# Altium PCB ArcadeJoystick.PcbDoc
Units mil, origin at the board's own origin, x right, y up, seen from the top; angles counter-clockwise.
Board outline 3930 x 2360.62 mil, 2 copper layers (Top Layer, Bottom Layer), stack 50.044 mil thick; 53 components, 82 nets, 266 pads, 42 vias.
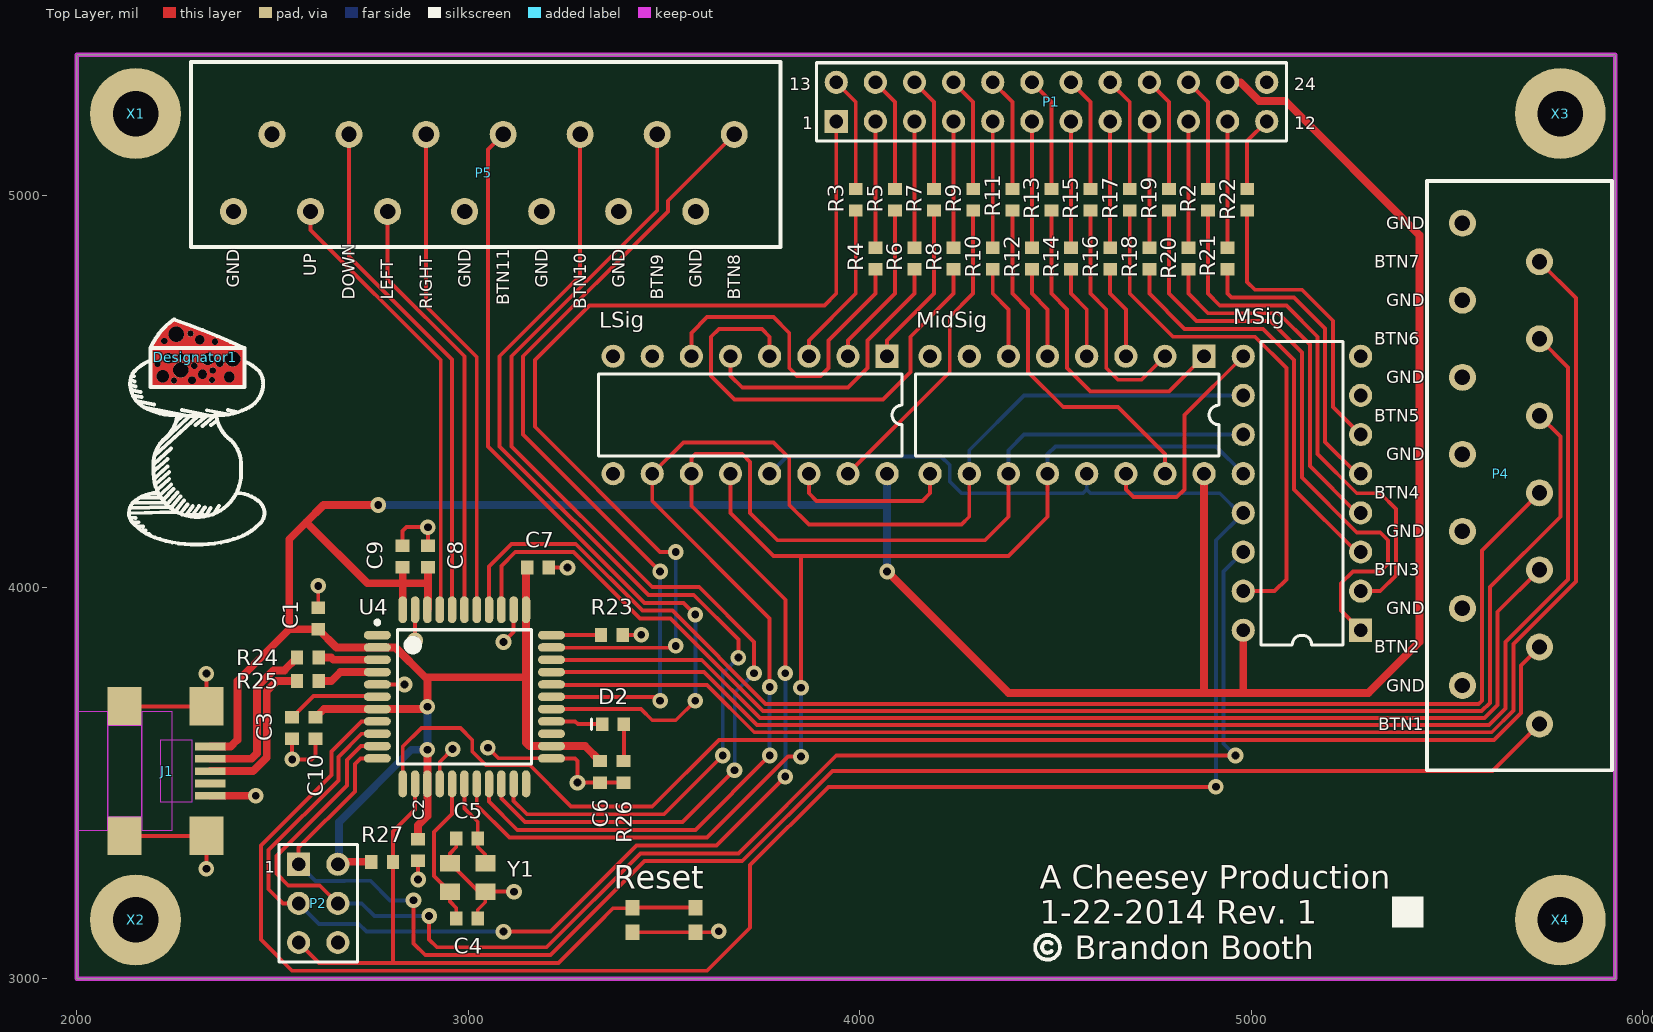
[diagram p0: Top Layer view]
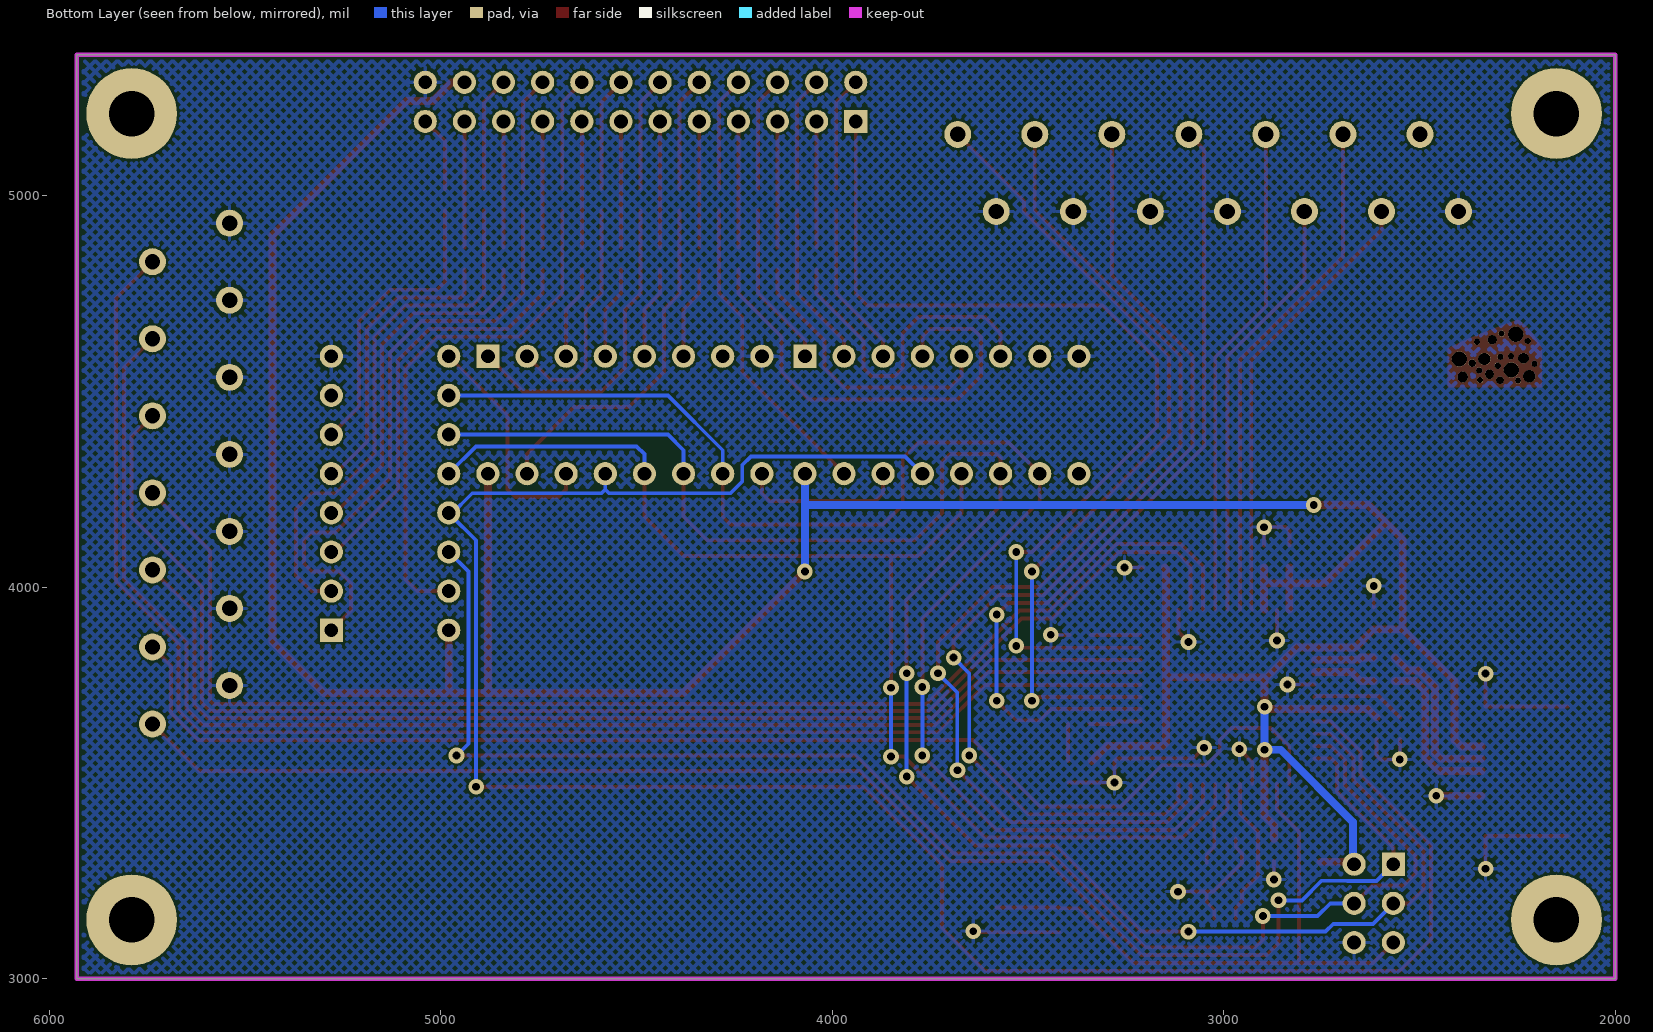
[diagram p1: Bottom Layer view, seen from below]

## Layer stack, top to bottom
Top Layer: signal copper 1.4
Dielectric: core 47.2441, FR-4, Dk 4.8
Bottom Layer: signal copper 1.4

## Board outline
2000,3000.06 5930,2999.38 5930,5360 2000,5360

## Design rules (kind name [scope] priority, off if disabled: settings)
Clearance "Clearance~Sunstone Circuits" [All] p1: gap=5.8 // Sunstone Circuits Minimum Clearance Rule (Double Sided)
DiffPairsRouting [All] p1: maxlimit=10 minlimit=5 mostfreqgap=5 maxuncoupledlength=500
HoleSize "HoleSize~Sunstone Circuits" [All] p1: absolutevalues=TRUE maxlimit=251 minlimit=16 maxpercent=80.000 minpercent=20.000 // SSC Hole Size Rule For Single Sided & Double Sided Designs.
HoleSize Testpoint [All] p2: absolutevalues=TRUE maxlimit=100 minlimit=1 maxpercent=80.000 minpercent=20.000
HoleSize TestPointUsage [All] p3: absolutevalues=TRUE maxlimit=100 minlimit=1 maxpercent=80.000 minpercent=20.000
MinimumAnnularRing "MinimumAnnularRing~Sunstone Circuits" [All] p1: minimumring=7 // Sunstone Circuits Minimum Annular Ring (Double Sided)
PlaneClearance "PlaneClearance~Sunstone Circuits" [All] p1: clearance=12 // Sunstone Circuits Power Plane Clearance Rule (Double Sided)
PlaneConnect "PlaneConnect~Sunstone Circuits" [All] p1: planeconnectstyle=Relief reliefexpansion=10 reliefentries=4 reliefconductorwidth=8 reliefairgap=10 // Sunstone Circuits Power Plane Connect Rule (Double Sided)
PolygonConnect "PolygonConnect~Sunstone Circuits" [All] p1: connectstyle=Relief reliefconductorwidth=8 reliefentries=4 polygonreliefangle="90 Angle" airgapwidth=10 // Sunstone Circuits Polygon Connect Style (Double Sided)
RoutingVias "RoutingVias~Sunstone Circuits" [All] p1: holewidth=16 width=30 viastyle="Through Hole" minholewidth=16 minwidth=30 maxholewidth=20 maxwidth=40 // Sunstone Circuits Routing Vias Rule (Double Sided)
ShortCircuit "ShortCircuit~Sunstone Circuits" [All] p1: allowed=FALSE // Sunstone Circuits Short Circuit Rule~Do Not Allow (Double Sided)
SilkToSolderMaskClearance SilkscreenOverComponentPads [IsPad] p1: minsilkscreentomaskgap=10 clearancetoexposedcopper=TRUE
SolderMaskExpansion "SolderMaskExpansion~Sunstone Circuits" [All] p1: expansion=3 // Sunstone Circuits Solder Mask Expansion Rule (Double Sided)
Width "Width~Sunstone Circuits" [All] p1: maxlimit=100 minlimit=8 preferedwidth=10 // Sunstone Circuits Minimum Width Rule (Double Sided)
22 further rules are at their usual default settings.

## Classes and differential pairs
component class ArcadeJoystick: LSig MidSig MSig P1 R2 R3 R4 R5 R6 R7 R8 R9 R10 R11 R12 R13 R14 R15 R16 R17 R18 R19 R20 R21 R22
component class Teensy: C1 C2 C3 C4 C5 C6 C7 C8 C9 C10 D2 J1 P2 P4 P5 R23 R24 R25 R26 R27 Reset S1 U4 X1 X2 X3 X4 Y1
differential pair USB: +USB_P -USB_N
differential pair USB_D: +USB_D_P -USB_D_N

## Components (designator, comment, footprint, x,y, rotation, side; value= is the part's Value field where it differs from the comment)
C1 "Cap Semi" 1608[0603] 2616.69,3920 r270 top
C2 "Cap Semi" 1608[0603] 2871.69,3328.35 r270 top
C3 "Cap Semi" 1608[0603] 2550,3640 r270 top
C4 "Cap Semi" 1608[0603] 2996.69,3153.35 r180 top
C5 "Cap Semi" 1608[0603] 2996.69,3358.35 r0 top
C6 "Cap Semi" 1608[0603] 3336.69,3528.35 r270 top
C7 "Cap Semi" 1608[0603] 3178.35,4050 r0 top
C8 "Cap Semi" 1608[0603] 2896.69,4078.35 r90 top
C9 "Cap Semi" 1608[0603] 2831.69,4078.35 r90 top
C10 "Cap Semi" 1608[0603] 2610,3640 r90 top
D2 "LED2" INDC1608L 3370,3650 r0 top
Designator1 "Comment" CHEESE 2305,4565 r0 top
J1 "UX60A-MB-5ST" UX60A-MB-5ST 2000,3530 r270 top
LSig "MC74HC595AN" 648-08 3720,4440 r180 top (schematic designator U1)
MidSig "MC74HC595AN" 648-08 4530,4440 r180 top (schematic designator U2)
MSig "MC74HC595AN" 648-08 5130,4240 r90 top (schematic designator U3)
P1 "Header 12X2A" HDR2X12_CEN 3940,5190 r0 top
P2 "Header 3X2" HDR2X3 2566.65,3292.24 r270 top
P4 "Header 14" "PTSA 0,5/14-2,5-Z" 5540,4930 r90 top
P5 "Header 14" "PTSA 0,5/14-2,5-Z" 2400,4960 r180 top
R2 "Res Semi" 1608[0603] 4890,4990 r270 top
R3 "Res Semi" 1608[0603] 3990,4990 r270 top
R4 "Res Semi" 1608[0603] 4040,4840 r90 top
R5 "Res Semi" 1608[0603] 4090,4990 r270 top
R6 "Res Semi" 1608[0603] 4140,4840 r90 top
R7 "Res Semi" 1608[0603] 4190,4990 r270 top
R8 "Res Semi" 1608[0603] 4240,4840 r90 top
R9 "Res Semi" 1608[0603] 4290,4990 r270 top
R10 "Res Semi" 1608[0603] 4340,4840 r90 top
R11 "Res Semi" 1608[0603] 4390,4990 r270 top
R12 "Res Semi" 1608[0603] 4440,4840 r90 top
R13 "Res Semi" 1608[0603] 4490,4990 r270 top
R14 "Res Semi" 1608[0603] 4540,4840 r90 top
R15 "Res Semi" 1608[0603] 4590,4990 r270 top
R16 "Res Semi" 1608[0603] 4640,4840 r90 top
R17 "Res Semi" 1608[0603] 4690,4990 r270 top
R18 "Res Semi" 1608[0603] 4740,4840 r90 top
R19 "Res Semi" 1608[0603] 4790,4990 r270 top
R20 "Res Semi" 1608[0603] 4840,4840 r90 top
R21 "Res Semi" 1608[0603] 4940,4840 r90 top
R22 "Res Semi" 1608[0603] 4990,4990 r90 top
R23 "Res Semi" 1608[0603] 3366.69,3878.35 r0 top
R24 "Res Semi" 1608[0603] 2590,3820 r0 top
R25 "Res Semi" 1608[0603] 2590,3760 r0 top
R26 "Res Semi" 1608[0603] 3396.69,3528.35 r90 top
R27 "Res Semi" 1608[0603] 2780,3298.35 r0 top
Reset "KMR231NGLFS" KMR231NGLFS 3500,3201.18 r180 top (schematic designator S1)
U4 "ATmega32U4-AU" 44ML_N 2990,3720 r0 top
X1 "4-40 Hole" "4-40 HOLE" 2150,5210 r0 top
X2 "4-40 Hole" "4-40 HOLE" 2150,3150 r0 top
X3 "4-40 Hole" "4-40 HOLE" 5790,5210 r0 top
X4 "4-40 Hole" "4-40 HOLE" 5790,3150 r0 top
Y1 "ABM8-16.000MHZ-10-1-U-T" ABM8-16.000MHZ-10-1-U-T 2998.11,3258.5 r0 top

## Footprints (in the part's own frame and the unit in brackets; to place one, negate y for a bottom-side part, rotate by r counter-clockwise, add the part's x,y. Pads: shape width x height; smd on the part's side, far side on the other; paste and mask are expansions set on the pad)
"4-40 HOLE" [mil]
  round 232 hole 116 unplated: 1(0,0)
44ML_N [mm] "Thin QFP, 44-Leads, Body 10x10mm, Pitch 0.8mm, IPC Medium Density"
  oval 1.75x0.55 smd: 1(-5.65,4) 2(-5.65,3.2) 3(-5.65,2.4) 4(-5.65,1.6) 5(-5.65,0.8) 6(-5.65,0) 7(-5.65,-0.8) 8(-5.65,-1.6) 9(-5.65,-2.4) 10(-5.65,-3.2) 11(-5.65,-4) 23(5.65,-4) 24(5.65,-3.2) 25(5.65,-2.4) 26(5.65,-1.6) 27(5.65,-0.8) 28(5.65,0) 29(5.65,0.8) 30(5.65,1.6) 31(5.65,2.4) 32(5.65,3.2) 33(5.65,4)
  oval 0.55x1.75 smd: 12(-4,-5.65) 13(-3.2,-5.65) 14(-2.4,-5.65) 15(-1.6,-5.65) 16(-0.8,-5.65) 17(0,-5.65) 18(0.8,-5.65) 19(1.6,-5.65) 20(2.4,-5.65) 21(3.2,-5.65) 22(4,-5.65) 34(4,5.65) 35(3.2,5.65) 36(2.4,5.65) 37(1.6,5.65) 38(0.8,5.65) 39(0,5.65) 40(-0.8,5.65) 41(-1.6,5.65) 42(-2.4,5.65) 43(-3.2,5.65) 44(-4,5.65)
  silkscreen extent -5.77,-4.35 4.35,4.95, body extent -5,-5 5,5, height 1.2
648-08 [mm] "DIP; 16 Leads; Row Spacing 7.62 mm; Pitch 2.54 mm"
  rect 1.5x1.5 hole 0.9: 1(-8.89,-3.81)
  round 1.5 hole 0.9: 2(-6.35,-3.81) 3(-3.81,-3.81) 4(-1.27,-3.81) 5(1.27,-3.81) 6(3.81,-3.81) 7(6.35,-3.81) 8(8.89,-3.81) 9(8.89,3.81) 10(6.35,3.81) 11(3.81,3.81) 12(1.27,3.81) 13(-1.27,3.81) 14(-3.81,3.81) 15(-6.35,3.81) 16(-8.89,3.81)
  silkscreen extent -9.85,-2.65 9.85,2.65
1608[0603] [mm] "Chip Capacitor, Body 1.6x0.8mm, IPC High Density"
  rect 0.8x0.9 smd: 1(-0.7,0) 2(0.7,0)
  body extent -0.87,-0.48 0.87,0.48, height 1.3
ABM8-16.000MHZ-10-1-U-T [mm]
  rect 1.3x1.05 smd: 0(-1.15,0.925) 0(1.15,-0.925) 2(-1.15,-0.925) 4(1.15,0.925)
CHEESE [mm]
  round 0.4 hole 0.4: 0(-2.515,0.152) 0(-2.083,1.626) 0(-1.448,-0.94) 0(-0.991,0.635) 0(-0.381,2.108) 0(-0.305,0.61) 0(-0.127,0.025) 0(1.016,-0.914) 0(1.067,-0.279) 0(1.219,1.575)
  round 0.8 hole 0.8: 0(-2.184,-0.66) 0(0.737,0.457)
  round 0.7 hole 0.7: 0(-1.803,0.508) 0(2.134,-0.711)
  round 1 hole 1: 0(-1.295,2.057) 0(-1.016,-0.254) 0(2.362,0.457)
  round 0.5 hole 0.5: 0(-0.279,-0.914) 0(1.524,0.178)
  round 0.6 hole 0.6: 0(0.229,1.702) 0(0.406,-0.533)
  Top Layer region: -2.972,-1.372 -2.972,1.168 3.124,1.168 3.124,-1.372
  Top Layer region: -2.972,1.168 -2.335,2.207 -1.44,3.033 -1.44,3.033 -1.425,3.012 0.873,2.148 3.124,1.168 3.124,1.168 3.124,1.168
  silkscreen extent -2.97,-1.37 3.12,3.03
HDR2X3 [mm] "Connector; Header; 3x2 Position"
  rect 1.5x1.5 hole 0.9: 1(0,0)
  round 1.5 hole 0.9: 2(0,2.54) 3(2.54,0) 4(2.54,2.54) 5(5.08,0) 6(5.08,2.54)
  silkscreen extent -1.27,-1.27 6.35,3.81
HDR2X12_CEN [mm] "Connector; Header; 12x2 Position"
  rect 1.5x1.5 hole 0.9: 1(0,0)
  round 1.5 hole 0.9: 2(2.54,0) 3(5.08,0) 4(7.62,0) 5(10.16,0) 6(12.7,0) 7(15.24,0) 8(17.78,0) 9(20.32,0) 10(22.86,0) 11(25.4,0) 12(27.94,0) 13(0,2.54) 14(2.54,2.54) 15(5.08,2.54) 16(7.62,2.54) 17(10.16,2.54) 18(12.7,2.54) 19(15.24,2.54) 20(17.78,2.54) 21(20.32,2.54) 22(22.86,2.54) 23(25.4,2.54) 24(27.94,2.54)
  silkscreen extent -1.27,-1.27 29.21,3.81
INDC1608L [mm] "Chip Inductor, Body 1.6x0.8mm, IPC High Density"
  rect 0.8x0.9 smd: 1(-0.7,0) 2(0.7,0)
  silkscreen extent -1.4,-0.35 -1.4,0.35, body extent -0.87,-0.48 0.87,0.48, height 0.55
KMR231NGLFS [mm] "Top Button Switch SMT"
  rect 0.9x1 smd: 1(-2.05,2.1) 1(2.05,2.1) 2(-2.05,0.5) 2(2.05,0.5)
  body extent -2,-0.1 2,2.7, height 1.9
"PTSA 0,5/14-2,5-Z" [mm] "PCB termination blocks, offset pins, 2.5 mm   pitch,      color: green"
  round 1.75 hole 1: 1(0,0) 2(-2.5,-5) 3(-5,0) 4(-7.5,-5) 5(-10,0) 6(-12.5,-5) 7(-15,0) 8(-17.5,-5) 9(-20,0) 10(-22.5,-5) 11(-25,0) 12(-27.5,-5) 13(-30,0) 14(-32.5,-5)
  silkscreen extent -35.5,-9.7 2.75,2.3
UX60A-MB-5ST [mm] "USBMiniBSocket"
  rect 2.5x2.2 smd: 0(-4.2,8.4) 0(-4.2,3.1) 0(4.2,8.4) 0(4.2,3.1)
  rect 0.5x2 smd: 1(-1.6,8.65) 2(-0.8,8.65) 3(0,8.65) 4(0.8,8.65) 5(1.6,8.65)
  Top Layer keep-out region: -2,5.4 2,5.4 2,7.5 -2,7.5
  Top Layer keep-out region: -3.85,4.2 3.85,4.2 3.85,6.2 -3.85,6.2
  Top Layer keep-out region: -2.95,2 2.95,2 2.95,4.2 -2.95,4.2
  Top Layer keep-out region: -3.85,0 3.85,0 3.85,2 -3.85,2

## Part data
C1 C2 C3 C4 C5 C6 C7 C8 C9 C10: "Capacitor (Semiconductor SIM Model)"
D2: "475-2816-1-ND"
J1: "USBMiniBSocket Metal Shield SMT Type Without Positioning Post"
LSig MidSig MSig: "8-Bit Serial-Input/Serial or Prallel-Output Shift Register with Latched 3-State Outputs"
P1: "Header, 12-Pin, Dual row"
P2: "Header, 3-Pin, Dual row"
P4 P5: "Header, 14-Pin"
R2 R3 R4 R5 R6 R7 R8 R9 R10 R11 R12 R13 R14 R15 R16 R17 R18 R19 R20 R21 R22 R23 R24 R25 R26 R27: "Semiconductor Resistor"
Reset: "KMR 2 Series  Microminiature SMT Top Actuated"
U4: "8-bit AVR Microcontroller, 2.7-5.5V, 32KB Flash, 2.5KB EEPROM, 1KB SRAM, USB Controller, 44-pin TQFP, Industrial Grade (-40°C to 85°C)"
Y1: "Crystal Resonator"

## Via types
v1: diameter 40, hole 20, Top Layer to Bottom Layer, 42 vias

## Nets (pads, with @x,y where several pads share a name; then routed paths per layer and width w, separated by ;. In a path a pad name is that pad's centre, name@x,y a point inside that pad or via, vN(x,y) a via of type N, cw(c..) or ccw(c..) an arc to the next point about the centre after c; other vN are vias at no path point)
A: MidSig.15 R11.2 | length 916
  Top Layer w10: R11.2 4390,4750 4430,4710 4430,4550 4520,4460 4660,4460 4780,4340 MidSig.15
B: MidSig.1 R13.2 | length 831.1
  Top Layer w10: R13.2 4490,4750 4530,4710 4530,4560 4590,4500 4790,4500 MidSig.1
BUTTON1/MISO: P2.1 P4.14 U4.11 | length 3954.6
  Top Layer w10: P2.1 2566.65,3335 2710,3478.35 2710,3548.35 2724.17,3562.52 U4.11 ; v1(2860,3200) 2860,3090 2890,3060 3210,3060 3450,3300 3700,3300 3930,3530 5616.38,3530 P4.14
  Bottom Layer w10: P2.1 2609.18,3249.72 2684.27,3249.72 2684.55,3250 2750,3250 2800,3200 v1(2860,3200)
BUTTON2: P4.12 U4.12 | length 3359.2
  Top Layer w10: U4.12 2832.52,3592.52 2880,3640 2980,3640 3010,3610 3010,3580 3044.99,3545.01 3157.49,3545.01 3262.5,3440 3470,3440 3640,3610 5620.91,3610 5690,3679.09 5690,3800.47 P4.12
BUTTON3: P4.10 U4.31 | length 2882.6
  Top Layer w10: U4.31 3596.42,3814.49 3745.46,3665.45 5596.36,3665.45 5630,3699.09 5630,3937.32 P4.10
BUTTON4: P4.8 U4.37 | length 3435.8
  Top Layer w10: U4.37 3052.99,4052.99 3110,4110 3274.54,4110 3444.54,3940 3521.82,3940 3759.82,3702 5242,3702 5242.55,3701.45 5581.45,3701.45 5590,3710 5590,4094.17 P4.8
BUTTON5: P4.6 U4.36 | length 3659.3
  Top Layer w10: U4.36 3084.49,4054.49 3120,4090 3269.09,4090 3439.09,3920 3516.37,3920 3752.92,3683.45 5588.9,3683.45 5610,3704.54 5610,4000 5790,4180 5790,4384.72 P4.6
BUTTON6: P4.4 U4.30 | length 3552.6
  Top Layer w10: U4.30 3602.46,3782.99 3738.01,3647.45 5607.45,3647.45 5650,3690 5650,3860 5810,4020 5810,4561.57 P4.4
BUTTON7: P4.2 U4.29 | length 3782.8
  Top Layer w10: U4.29 3213.95,3749.99 3610.01,3749.99 3730.55,3629.45 5614.9,3629.45 5670,3684.54 5670,3854.54 5830,4014.54 5830,4738.43 P4.2
BUTTON8: P5.14 U4.28 | length 2097
  Top Layer w10: U4.28 3480,3720 v1(3490,3710) ; v1(3490,4040) 3140,4390 3140,4590 3510,4960 3510,4987.32 P5.14
  Bottom Layer w10: v1(3490,3710) v1(3490,4040)
BUTTON9: P5.12 U4.20 | length 2839.3
  Top Layer w10: U4.20 3084.49,3460.05 3144.54,3400 3547.51,3400 v1(3680,3532.49) ; P5.12 3482.68,4962.68 3110,4590 3110,4360 3470,4000 3590,4000 3730,3860 v1(3730,3780)
  Bottom Layer w10: v1(3680,3532.49) 3680.8,3533.29 3680.8,3730.8 v1(3730,3780)
BUTTON10: P5.10 U4.21 | length 2663.1
  Top Layer w10: U4.21 3115.98,3454.02 3150,3420 3500,3420 v1(3650,3570) ; P5.10 3285.83,4795.83 3080,4590 3080,4360 3460,3980 3575.98,3980 3690,3865.98 v1(3690,3820)
  Bottom Layer w10: v1(3650,3570) 3650,3780 v1(3690,3820)
BUTTON11: P5.8 U4.27 | length 2141.2
  Top Layer w10: P5.8 3050,5117.87 3050,4360 3450,3960 3550,3960 v1(3580,3930) ; U4.27 3441.5,3688.5 3470,3660 3530,3660 v1(3580,3710)
  Bottom Layer w10: v1(3580,3710) v1(3580,3930)
BUTTONDOWN: P5.4 U4.40 | length 1323.4
  Top Layer w10: P5.4 2695.28,4844.73 2958.5,4581.5 U4.40
BUTTONLEFT: P5.5 U4.39 | length 1098.9
  Top Layer w10: P5.5 2793.7,4786.3 2990,4590 U4.39
BUTTONRIGHT: P5.6 U4.38 | length 1268
  Top Layer w10: P5.6 2892.13,4717.87 3021.5,4588.5 U4.38
BUTTONUP: P5.3 U4.41 | length 1156.5
  Top Layer w10: P5.3 2596.85,4913.15 2929.69,4580.31 2929.69,3945.13 U4.41
C: MidSig.2 R15.2 | length 606.3
  Top Layer w10: R15.2 4590,4750 4630,4710 4630,4560 4660,4530 4720,4530 MidSig.2
D: MidSig.3 R16.1 | length 239
  Top Layer w10: R16.1 4640,4750 4680,4710 MidSig.3
E: MidSig.4 R14.1 | length 239
  Top Layer w10: R14.1 4540,4750 4580,4710 MidSig.4
F: MidSig.5 R12.1 | length 239
  Top Layer w10: R12.1 4440,4750 4480,4710 MidSig.5
G: MidSig.6 R10.1 | length 239
  Top Layer w10: R10.1 4340,4750 4380,4710 MidSig.6
GND: C1.1 C2.2 C3.2 C4.1 C5.1 C6.2 C7.2 C8.2 C9.2 C10.1 J1.0 J1.5 LSig.8 MidSig.8 MSig.8 P1.24 P2.6 P4.1 P4.3 P4.5 P4.7 P4.9 P4.11 P4.13 P5.1 P5.7 P5.9 P5.11 P5.13 R23.2 R26.1 Reset.1 U4.5 U4.15 U4.23 U4.35 U4.43 Y1.0 | length 2553.2
  Top Layer w10: J1.0@2122.05,3364.65 2330.71,3364.65 v1(2330.71,3280.71) ; J1.0@2122.05,3695.35 2330.71,3695.35 v1(2330.71,3779.29) ; C3.2 v1(2550,3560) 2600,3560 2610,3570 C10.1 ; C1.1@2614.25,3950 C1.1 v1(2616.69,4003.31) ; U4.5 v1(2836.85,3751.5) ; C9.2 2831.69,4143.35 2841.69,4153.35 v1(2896.69,4153.35) C8.2 ; v1(2864.02,3864.02) U4.43 ; v1(2871.69,3253.35) C2.2 ; U4.15 2927.01,3553.34 v1(2960,3586.33) ; C5.1 2969.13,3335.79 2952.83,3319.49 2952.83,3294.92 3025.67,3222.09 Y1.0@3043.39,3222.09 ; C4.1 3024.25,3175.91 3043.39,3195.04 Y1.0@3043.39,3222.09 ; v1(3050,3590) 3076.99,3563.01 3211.95,3563.01 U4.23 3272.52,3562.52 3279.13,3555.91 v1(3279.13,3500.79) C6.2 R26.1 ; v1(3090,3860) 3115.98,3885.98 U4.35 ; v1(3116.69,3222.09) Y1.0@3043.39,3222.09 ; C7.2 v1(3253.35,4050) v1@3253.35,4065 ; R23.2 v1(3441.69,3878.35) ; Reset.1@3419.29,3118.5 3580.71,3118.5 3637.32,3118.5 v1(3640,3121.18)
  Top Layer w20: J1.5 v1(2457.01,3467.01)
LATCH_CLOCK: LSig.12 MidSig.12 MSig.12 U4.18 | length 3220.1
  Top Layer w10: U4.18 3021.5,3443.54 3105.04,3360 3610,3360 3817.04,3567.04 v1(3850,3567.04) ; LSig.12 3670,4190 3780,4080 3850,4080 ; v1(3850,3743.14) 3850,4080 ; MidSig.12 4480,4180 4380,4080 3850,4080
  Bottom Layer w10: v1(3850,3567.04) v1(3850,3743.14) ; MidSig.12 4480,4340 4500,4360 4910,4360 MSig.12 ; MSig.12@4969.2,4280.8 MSig.12@4969.2,4290.8
LED: P1.1 U4.32 | length 2501.8
  Top Layer w10: U4.32@3213.08,3845.35 3525.35,3845.35 v1(3530,3850) ; v1(3530,4090) 3490,4090 3170,4410 3170,4580 3310,4720 3910,4720 3940,4750 P1.1
  Bottom Layer w10: v1(3530,3850) v1(3530,4090)
LS_A: LSig.15 R9.2 | length 805
  Top Layer w10: LSig.15 4230,4550 4230,4690 4290,4750 R9.2
LS_B: LSig.1 R7.2 | length 422.1
  Top Layer w10: LSig.1 4070,4630 4190,4750 R7.2
LS_C: LSig.2 R5.2 | length 422.1
  Top Layer w10: LSig.2 3970,4630 4090,4750 R5.2
LS_D: LSig.3 R3.2 | length 422.1
  Top Layer w10: LSig.3 3870,4630 3990,4750 R3.2
LS_E: LSig.4 R8.1 | length 1188.4
  Top Layer w10: LSig.4 3770,4640 3750,4660 3640,4660 3620,4640 3620,4540 3680,4480 4060,4480 4130,4550 4130,4640 4240,4750 R8.1
LS_F: LSig.5 R6.1 | length 735.3
  Top Layer w10: LSig.5 3670,4540 3700,4510 3970,4510 4020,4560 4020,4630 4140,4750 R6.1
LS_G: LSig.6 R4.1 | length 851.9
  Top Layer w10: LSig.6 3570,4650 3610,4690 3780,4690 3820,4650 3820,4560 3840,4540 3900,4540 3920,4560 3920,4630 4040,4750 R4.1
LS_SERIALOUT: LSig.9
MOSI: MSig.14 P2.4 U4.10 | length 3776.2
  Top Layer w10: P2.4 2620.55,3238.35 2540,3238.35 2510,3268.35 2510,3313.03 2690,3493.03 2690,3558.35 2725.67,3594.02 U4.10 ; v1(2900,3160) 2900,3100 2920,3080 3200,3080 3440,3320 3690,3320 3940,3570 v1(4960,3570)
  Bottom Layer w10: P2.4 2727.76,3192.24 2760,3160 v1(2900,3160) ; v1(4960,3570) 4930,3600 4930,4040 MSig.14
MS_A: MSig.15 R17.2 | length 1353.6
  Top Layer w10: R17.2 4690,4750 4800,4640 5010,4640 5090,4560 5090,4020 5060,3990 MSig.15
MS_B: MSig.1 R19.2 | length 1562.3
  Top Layer w10: R19.2 4790,4750 4860,4680 5050,4680 5130,4600 5130,4280 5270,4140 5330,4140 5350,4120 5350,4060 5330,4040 5260,4040 5230,4010 5230,3940 MSig.1
MS_C: MSig.2 R2.2 | length 1372.6
  Top Layer w10: R2.2 4890,4750 4920,4720 5090,4720 5170,4640 5170,4340 5270,4240 5330,4240 5370,4200 5370,4030 5330,3990 MSig.2
MS_D: MSig.3 R18.1 | length 1059.1
  Top Layer w10: R18.1 4740,4750 4830,4660 5030,4660 5110,4580 5110,4250 MSig.3@5270,4090
MS_E: MSig.4 R20.1 | length 906
  Top Layer w10: R20.1 4840,4750 4890,4700 5070,4700 5150,4620 5150,4310 MSig.4@5270,4190
MS_F: MSig.5 R21.1 | length 752.9
  Top Layer w10: R21.1 4940,4750 4950,4740 5110,4740 5189.2,4660.8 5189.2,4370.8 MSig.5@5270,4290
MS_G: MSig.6 R22.1 | length 762.9
  Top Layer w10: R22.1 4990,4780 5010,4760 5130,4760 5209.2,4680.8 5209.2,4460.8 MSig.6
MS_SERIALOUT: MidSig.14 MSig.9 | length 608.7
  Top Layer w10: MidSig.14 4680,4250 4700,4230 4810,4230 4830,4250 4830,4440 MSig.9
NetD2_2: D2.2 R26.2 | length 94.5
  Top Layer w10: R26.2 3397.56,3556.77 D2.2
NetP1_2: P1.2 R4.2 | length 322.4
  Top Layer w10: R4.2 P1.2
NetP1_3: P1.3 R6.2 | length 322.4
  Top Layer w10: R6.2 P1.3
NetP1_4: P1.4 R8.2 | length 322.4
  Top Layer w10: R8.2 P1.4
NetP1_5: P1.5 R10.2 | length 322.4
  Top Layer w10: R10.2 P1.5
NetP1_6: P1.6 R12.2 | length 322.4
  Top Layer w10: R12.2 P1.6
NetP1_7: P1.7 R14.2 | length 322.4
  Top Layer w10: R14.2 P1.7
NetP1_8: P1.8 R16.2 | length 322.4
  Top Layer w10: R16.2 P1.8
NetP1_9: P1.9 R18.2 | length 322.4
  Top Layer w10: R18.2 P1.9
NetP1_10: P1.10 R20.2 | length 322.4
  Top Layer w10: R20.2 P1.10
NetP1_11: P1.11 R21.2 | length 322.4
  Top Layer w10: R21.2 P1.11
NetP1_12: P1.12 R22.2 | length 193.2
  Top Layer w10: R22.2 4990,5140 P1.12
NetP1_13: P1.13 R3.1 | length 293.2
  Top Layer w10: P1.13 3990,5240 R3.1
NetP1_14: P1.14 R5.1 | length 293.2
  Top Layer w10: P1.14 4090,5240 R5.1
NetP1_15: P1.15 R7.1 | length 293.2
  Top Layer w10: P1.15 4190,5240 R7.1
NetP1_16: P1.16 R9.1 | length 293.2
  Top Layer w10: P1.16 4290,5240 R9.1
NetP1_17: P1.17 R11.1 | length 293.2
  Top Layer w10: P1.17 4390,5240 R11.1
NetP1_18: P1.18 R13.1 | length 293.2
  Top Layer w10: P1.18 4490,5240 R13.1
NetP1_19: P1.19 R15.1 | length 293.1
  Top Layer w10: P1.19 4590,5240 R15.1
NetP1_20: P1.20 R17.1 | length 293.2
  Top Layer w10: P1.20 4690,5240 R17.1
NetP1_21: P1.21 R19.1 | length 293.2
  Top Layer w10: P1.21 4790,5240 R19.1
NetP1_22: P1.22 R2.1 | length 293.1
  Top Layer w10: P1.22 4890,5240 R2.1
OUTPUT_ENABLE: LSig.13 MidSig.13 MSig.13 U4.8 | length 5545.2
  Top Layer w10: U4.8 2727.01,3657.01 2650,3580 2650,3520 2470,3340 2470,3100 2550,3020 3610,3020 3720,3130 3720,3290 3920,3490 v1(4910,3490)
  Bottom Layer w10: LSig.13 3814.03,4334.03 4207.83,4334.03 4230,4311.85 4230,4270 4260,4240 4570,4240 4580,4250 ; MidSig.13 4580,4250 ; v1(4910,3490) 4910,4120 4975,4185 4920,4240 4590,4240 4580,4250
PD4: U4.25
PD5: U4.22
PE2/HWB: R23.1 U4.33 | length 125.8
  Top Layer w10: U4.33@3213.31,3878.35 R23.1
PE6: U4.1
PWR_LED: D2.1 U4.26 | length 134.8
  Top Layer w10: U4.26@3213.78,3658.35 U4.26 3272.99,3657.01 3280,3650 D2.1
RESET: P2.5 R27.2 Reset.2 U4.13 | length 1575.2
  Top Layer w10: P2.5 2618.9,3040 2807.56,3040 ; U4.13 2864.02,3432.36 2807.56,3375.91 R27.2 2807.56,3040 ; Reset.2@3580.71,3181.5 3419.29,3181.5 3417.64,3179.84 3369.84,3179.84 3329.84,3139.84 3230,3040 2807.56,3040
RESET_DIGITS: LSig.10 MidSig.10 MSig.10 U4.19 | length 3652
  Top Layer w10: U4.19 3052.99,3452.05 3125.04,3380 3580,3380 v1(3770,3570) ; v1(3770,3745) 3770,3920 3470,4220 LSig.10 3550,4370 3780,4370 3820,4330 3820,4210 3870,4160 4260,4160 4280,4180 MidSig.10
  Bottom Layer w10: v1(3770,3570) v1(3770,3745) ; MidSig.10 4280,4350 4420,4490 MSig.10
SCLK: LSig.11 MidSig.11 MSig.11 P2.3 U4.9 | length 4771
  Top Layer w10: P2.3 2526.1,3192.24 2490,3228.35 2490,3328.35 2668,3506.35 2668,3566.35 2727.17,3625.51 U4.9 ; v1(3090,3120) 3210,3120 3430,3340 3634,3340 v1(3810,3516) ; v1(3810,3780) 3810,3968 3570,4208 LSig.11 3570,4330 3580,4340 3700,4340 3720,4320 3720,4190 3790,4120 4320,4120 4380,4180 MidSig.11
  Bottom Layer w10: P2.3 2618.9,3140 2720,3140 2740,3120 v1(3090,3120) ; v1(3810,3516) v1(3810,3780) ; MidSig.11 4380,4350 4420,4390 MSig.11
SERIALOUT: LSig.14 MidSig.9 | length 426.6
  Top Layer w10: LSig.14 3870,4240 3890,4220 4160,4220 4180,4240 MidSig.9
UCAP: C3.1 U4.6 | length 240.7
  Top Layer w10: C3.1 2604.09,3721.65 2765.91,3721.65 U4.6
USB_D_N: J1.2 R24.1 | length 428.5
  Top Layer w20: J1.2 2446.14,3561.5 2460,3575.36 2460,3745.36 2502.2,3787.56 2530,3787.56 R24.1
USB_D_P: J1.3 R25.1 | length 416.7
  Top Layer w20: J1.3 2450,3530 2485,3565 2485,3735 2510,3760 2530,3760 R25.1
USB_N: R24.2 U4.3 | length 152.3
  Top Layer w20: R24.2 2650,3820 2655.51,3814.49 U4.3
USB_P: R25.2 U4.4 | length 159.5
  Top Layer w20: R25.2 2650,3760 2672.99,3782.99 U4.4
VCC: C1.2 C2.1 C6.1 C7.1 C8.1 C9.1 C10.2 J1.1 LSig.16 MidSig.16 MSig.16 P1.23 P2.2 R27.1 U4.2 U4.7 U4.14 U4.24 U4.34 U4.42 U4.44 | length 9530.3
  Top Layer w20: J1.1 2392.99,3592.99 2410,3610 2410,3760 2542.44,3892.44 ; C10.2 2630.94,3688.5 U4.7 2889.53,3688.5 v1(2895.51,3694.49) 2895.51,3764.49 2890,3770 ; P2.2 2672.76,3298.35 R27.1 ; v1(2770,4210) 2630,4210 2586.22,4166.22 ; C9.1 2832.52,4049.96 2832.52,4010 ; U4.44 2832.52,4010 ; C2.1 2871.69,3391.69 2895.51,3415.51 U4.14 v1(2895.51,3584.49) ; U4.42 2896.69,3943.62 2896.69,4010 ; C8.1 2896.69,4010 ; C7.1 3147.48,4046.69 U4.34 3147.48,3770 ; C6.1 3298.58,3594.02 U4.24 3155.98,3594.02 3147.48,3602.52 3147.48,3770 ; v1(4070,4040) 4380,3730 4880,3730 ; MidSig.16 4880,3730 ; P1.23 4972.79,5290 5020.31,5242.47 5087.53,5242.47 5430,4900 5430,3860 5300,3730 4880,3730 ; 4980,3730 MSig.16@4980,3880.8 ; 2542.44,3892.44 C1.2 2663.15,3845.98 U4.2 2814.02,3845.98 2890,3770 ; 2542.44,3892.44 2542.44,4122.44 2586.22,4166.22 ; 2586.22,4166.22 2742.44,4010 2832.52,4010 ; 2832.52,4010 2896.69,4010 ; 2890,3770 3147.48,3770
  Bottom Layer w20: P2.2 2670,3295.59 2670,3400 2854.49,3584.49 v1(2895.51,3584.49) v1(2895.51,3694.49) ; v1(2770,4210) 4070,4210 ; v1(4070,4040) 4070,4210 ; LSig.16 4070,4210
XTAL1: C5.2 U4.17 Y1.4 | length 224.8
  Top Layer w10: U4.17 2990,3435.04 3024.25,3400.79 C5.2 3024.25,3335.79 3043.39,3316.65 Y1.4
XTAL2: C4.2 U4.16 Y1.2 | length 386.8
  Top Layer w10: U4.16 2958.5,3420.16 2912.41,3374.06 2912.41,3262.51 Y1.2 2952.83,3197.21 2969.13,3180.91 C4.2
pads on no net: Designator1.0 J1.4 LSig.7 MidSig.7 MSig.7 P5.2 X1.1 X2.1 X3.1 X4.1

## Polygon pours and split planes (outlines as drawn)
GND on Bottom Layer "Ground Plane" (hatched 45Degree grid 20 track 10, remove dead copper, pour order 2): 1993.77,5363.28 1993.77,3003.34 5923.09,3003.34 5923.77,3002.66 5923.77,5363.28

## Keep-outs
Keep-Out Layer:
  the board outline again, w11.81

## Silkscreen, mask and mechanical layers (free items; w line width, h text height)
Top Overlay:
  circle w10: c4480,3080 r31.62
  rectangle: 5360,3130 5440,3210
  lines w10: 2133,4189 2252,4192 ; 2135,4178 2150,4177 ; 2135,4202 2237,4205 ; 2136,4517 2150,4513 ; 2137,4530 2147,4526 ; 2138,4504 2162,4499 ; 2141,4541 2146,4539 ; 2142,4167 2158,4166 ; 2143,4215 2225,4216 ; 2143,4490 2165,4486 ; 2145.89,4551.1 cw(c2226.7,4474.57) 2183.42,4577.11 ; 2146,4551 ccw(c2186,4521) 2136,4521 ccw(c2206.71,4521) 2179.65,4455.67 ccw(c2250.16,4601.51) 2235.92,4440.15 ccw(c2290.54,4985.61) 2285.97,4437.44 2326.03,4437.44 ccw(c2321.46,4985.61) 2376.08,4440.15 ccw(c2361.84,4601.51) 2432.35,4455.67 ccw(c2405.29,4521) 2476,4521 ccw(c2426,4521) 2466,4551 ; 2147,4552 2149.11,4551.65 ; 2152,4476 2197,4467 ; 2153,4156 2169,4155 ; 2162,4229 2215,4229 ; 2166,4145 2175.03,4144.4 ; 2172.89,4459.44 2284,4438 ; 2180,4136 2183.97,4135.64 ; 2196,4314 2241,4355 ; 2197,4297 2232,4328 ; 2198,4278 2231,4308 ; 2199,4336 2308.41,4435.64 ; 2200,4262 2236,4294 ; 2205,4248 2236,4277 ; 2206,4241 ccw(c2206,4151) 2142.36,4214.64 ccw(c2171,4189.64) 2146,4161 ccw(c2251,4266) 2211.93,4122.74 ccw(c2294.83,4383.91) 2275.97,4110.55 ccw(c2305.76,4390.79) 2336.03,4110.6 ; 2212,4366 2287,4436 ; 2214,4237 2241,4262 ; 2221,4224 2247,4251 ; 2231,4213 2257,4242 ; 2241,4203 2265,4232 ; 2253,4196 2274,4222 ; 2254,4423 2269,4437 ; 2255.56,4436.05 cw(c2171,4446) 2226,4381 ccw(c2281,4316) 2196,4321 2196,4291 ccw(c2307.8,4291) 2419.61,4291 2419.61,4317.39 ccw(c2331,4312.39) 2386.51,4381.64 cw(c2440.94,4446.57) 2356.89,4435.86 ; 2266,4190 2283,4212 ; 2268,4453 2343,4438 ; 2279,4184 2296,4207 ; 2289,4184 2324,4184 2325,4183 ; 2293,4181 2312,4207 ; 2303,4414 2331,4437 ; 2311,4181 2327,4204 ; 2321,4412 2351,4437 ; 2329,4182 2342,4203 ; 2332,4452 2387,4441 ; 2336.03,4110.55 ccw(c2317.17,4383.91) 2400.07,4122.74 ccw(c2361,4266) 2466,4161 ccw(c2441,4189.64) 2469.64,4214.64 ccw(c2406,4151) 2409.95,4240.91 ; 2343,4414 2358,4426 ; 2349,4187 2363,4208 ; 2386,4453 2412,4447 ; 2428.58,4577.11 cw(c2385.3,4474.57) 2466.11,4551.1 ; 4490,3070 cw(c4480,3080) 4490,3090
  text "GND" at 5344.99,4915 h32
  text "BTN7" at 5315,4816.54 h32
  text "UP" at 2611.92,4794.97 h32 r90
  text "GND" at 2415,4764.98 h32 r90
  text "GND" at 3005.77,4764.98 h32 r90
  text "GND" at 3202.69,4764.98 h32 r90
  text "GND" at 3399.61,4764.98 h32 r90
  text "GND" at 3596.54,4764.98 h32 r90
  text "DOWN" at 2710.38,4734.99 h32 r90
  text "LEFT" at 2808.85,4734.99 h32 r90
  text "BTN9" at 3498.08,4734.99 h32 r90
  text "BTN8" at 3695,4734.99 h32 r90
  text "BTN11" at 3104.23,4720 h32 r90
  text "GND" at 5344.99,4718.08 h32
  text "RIGHT" at 2907.31,4710 h32 r90
  text "BTN10" at 3301.15,4710 h32 r90
  text "BTN6" at 5315,4619.61 h32
  text "GND" at 5344.99,4521.15 h32
  text "BTN5" at 5315,4422.69 h32
  text "GND" at 5344.99,4324.23 h32
  text "BTN4" at 5315,4225.77 h32
  text "GND" at 5344.99,4127.31 h32
  text "BTN3" at 5315,4028.85 h32
  text "GND" at 5344.99,3930.38 h32
  text "BTN2" at 5315,3831.92 h32
  text "GND" at 5344.99,3733.46 h32
  text "BTN1" at 5325,3635 h32
  text "A Cheesey Production" at 4460,3230 h60
  text "1-22-2014 Rev. 1" at 4460,3140 h60
  text "Brandon Booth" at 4550,3050 h60

## Text inside footprints (layer, text, board x,y; h text height)
P1: Top Overlay "24" at 5110.33,5270 h32; Top Overlay "12" at 5110,5170 h32; Top Overlay "13" at 3820,5270 h32; Top Overlay "1" at 3852.68,5170 h32
P2: Top Overlay "1" at 2480,3270 h30